# Altium PCB PCB3.PcbDoc (part 3 of 4)
Units mil, origin at the board's own origin, x right, y up, seen from the top; angles counter-clockwise.
Board outline 6000 x 4000 mil, 2 copper layers (Top Layer, Bottom Layer); 365 components, 395 nets, 1535 pads, 0 vias.
Unrouted connection lines stored in the file: 834.
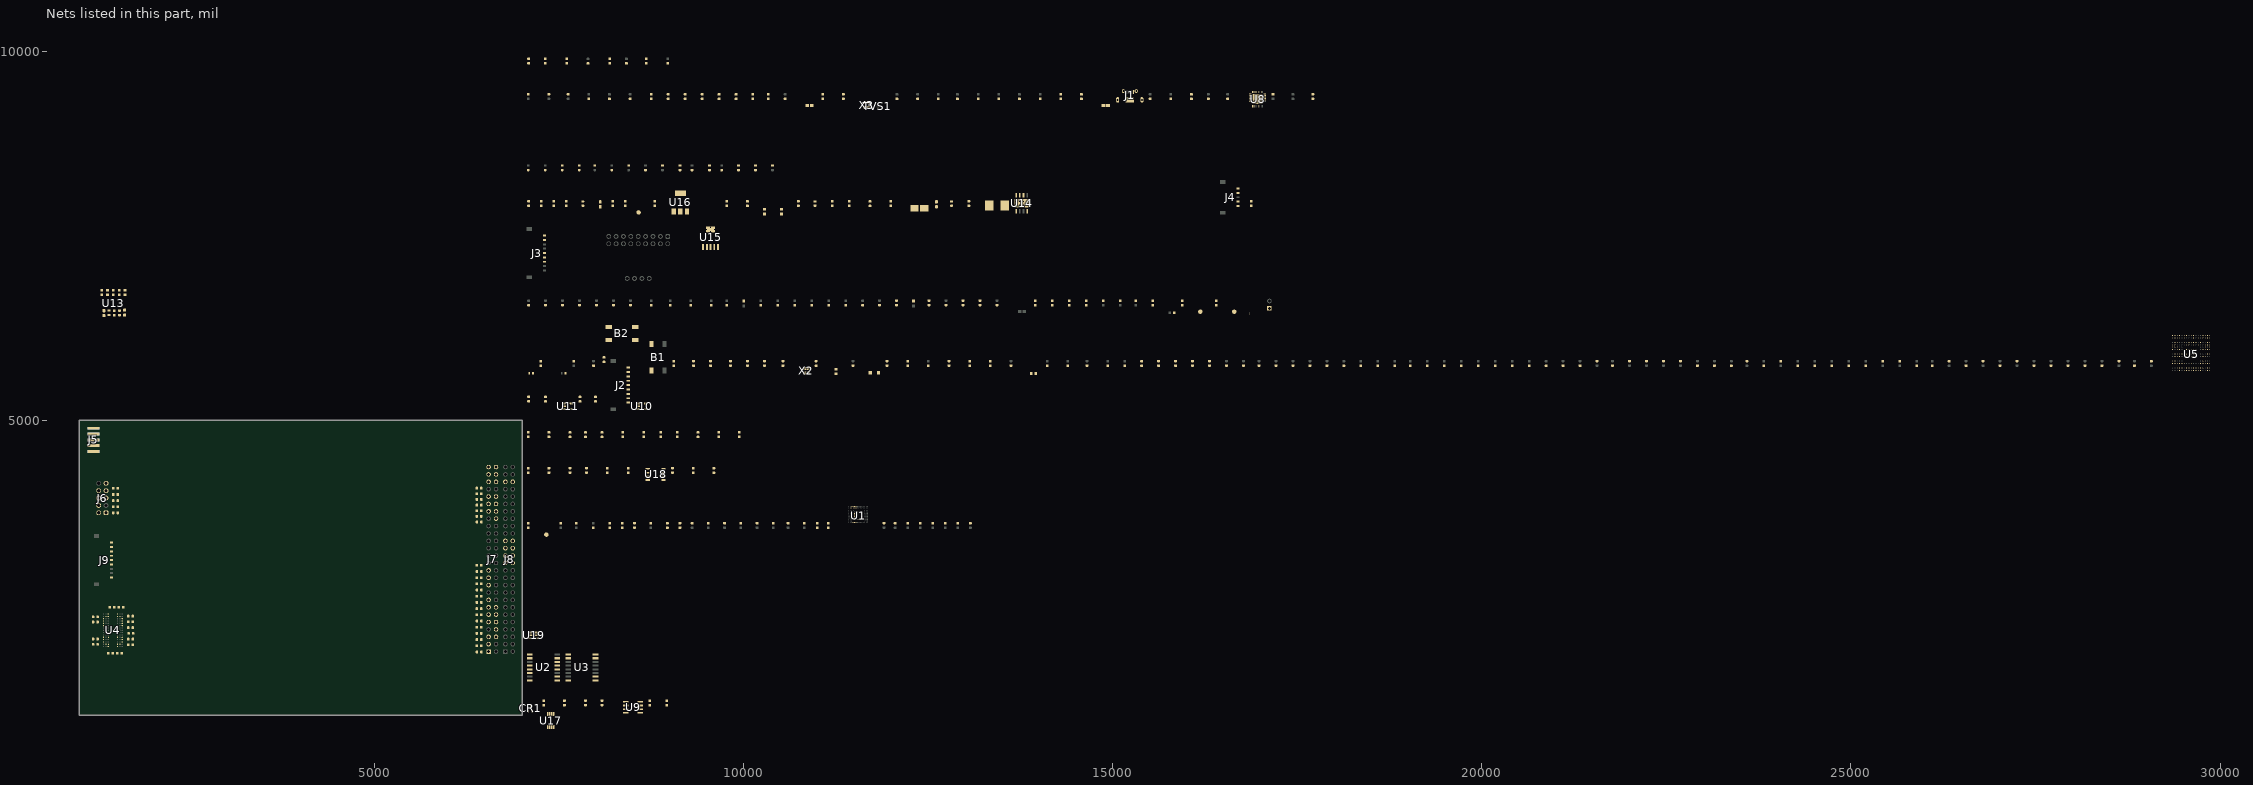
[diagram p2: the nets of this part, all layers, seen from the top]

## Nets (pads, with @x,y where several pads share a name; then routed paths per layer and width w, separated by ;. In a path a pad name is that pad's centre, name@x,y a point inside that pad or via, vN(x,y) a via of type N, cw(c..) or ccw(c..) an arc to the next point about the centre after c; other vN are vias at no path point)
1V8: C33.2 C61.2 TP2.1 U8.28 U8.30 U16.2
3.3V: C38.1 C39.1 U9.3
3V3: B2.1 B2.2 C1.2 C2.2 C3.2 C4.2 C7.2 C8.1 C9.2 C10.2 C11.2 C12.2 C13.2 C14.2 C15.2 C16.2 C17.2 C18.2 C19.2 C20.2 C21.2 C22.2 C26.2 C29.2 C36.2 C37.2 C41.2 C42.2 C43.2 C44.2 C56.2 C58.2 C62.2 C65.2 C66.2 C69.2 C71.2 C85.2 C86.2 DS1.1 DS2.1 J5.6 J6.1 J10.1 R1.2 R2.2 R3.2 R4.2 R5.2 R6.2 R7.2 R8.2 R17.2 R18.2 R35.1 R36.1 R109.1 R111.2 R112.1 R114.1 R135.2 R136.1 R137.1 R138.1 R139.1 R146.2 R147.2 R155.2 R162.1 R163.1 R164.1 R165.1 R192.2 R193.2 R194.2 R205.1 U1.C6 U1.E6 U1.F5 U1.J10 U1.K9 U1.M4 U1.N4 U1.P3 U1.P5 U2.2 U3.2 U4.A7 U4.B2 U4.B7 U4.C9 U4.D9 U4.E1 U4.F9 U4.L1 U4.L7 U4.M9 U4.N9 U4.P2 U4.P7 U4.R7 U5.M1 U8.21 U8.32 U10.1 U11.1 U15.4 U15.5 U16.3 U17.1 U17.8 U18.8 U19.1 X2.4 X3.4
3V3_BUS: J8.27 J8.28
3V3_SW1: J7.48
3V3_SW2: J7.50
3V3_SW3: J7.52
5V: C53.2 C54.2 C57.2 C59.1 L1.2 R153.1 U15.1 U15.2
5V_BUS: J8.25 J8.26
5V_SW1: J7.47
5V_SW2: J7.49
5V_SW3: J7.51
12V: C45.1 C50.2 C51.1 R154.2 U13.6 U14.7
12V_CONN: C46.1 J4.1 J4.2 J9.1 R148.1 U13.5
AUXOFF: R146.1 U13.3
BOOT0: R108.1 R109.2 U5.E8
CAN0_H: J7.03 R171.2
CAN0_L: J7.01 R170.2
CAN_RX: U5.E16 U9.4
CAN_TX: U5.E17 U9.1
COMM_I2C4_EN: R168.2 U5.D3
COMM_I2C4_SCL: R166.2 U5.R16
COMM_I2C4_SDA: R167.2 U5.R17
DEBUG_UART_RX: J5.9 R161.1 U5.N4
DEBUG_UART_TX: J5.8 R160.1 U5.N5
eMMC_RSTn: R17.1 R19.1 U1.K5
FLT#: R147.1 R149.1 U13.4
FPGA_D0: U5.N6
FPGA_D1: U5.P6
FPGA_D2: U5.T6
FPGA_D3: U5.U6
FPGA_D4: U5.U7
FPGA_D5: U5.R12
FPGA_D6: U5.N15
FPGA_D7: U5.N14
FPGA_D8: U5.N13
FPGA_D9: U5.M14
FPGA_RefC: U5.E15
FPGA_STATUS0: U5.L14
FPGA_STATUS1: U5.K14
FPGA_STATUS2: U5.D11
FPGA_STATUS3: U5.E10
FPGA_STATUS4: U5.D10
FPGA_TxC: U5.N3
FPGA_TxC_N: J3.7
FPGA_TxC_P: J3.6
FPGA_TxD_N: J3.2
FPGA_TxD_P: J3.1
FRAM_CS: R195.1 U5.T4
FRAM_SPI6_MISO: R198.1 U5.R3
FRAM_SPI6_MOSI: R197.1 U5.R5
FRAM_SPI6_SCK: R196.1 U5.D9
GND: B1.1 B1.2 C1.1 C2.1 C3.1 C4.1 C5.1 C6.1 C7.1 C8.2 C9.1 C10.1 C11.1 C12.1 C13.1 C14.1 C15.1 C16.1 C17.1 C18.1 C19.1 C20.1 C21.1 C22.1 C23.1 C24.1 C25.1 C26.1 C28.1 C29.1 C30.1 C31.1 C32.1 C33.1 C34.1 C35.1 C36.1 C37.1 C38.2 C39.2 C40.2 C41.1 C42.1 C43.1 C44.1 C45.2 C46.2 C47.1 C48.1 C51.2 C52.1 C54.1 C55.1 C59.2 C60.1 C61.1 C62.1 C63.1 C64.1 C67.1 C68.1 C70.1 C72.1 C79.2 C80.2 C81.2 C82.1 C83.1 C84.1 C85.1 C86.1 C87.2 C88.1 C89.2 C90.1 C91.1 C92.1 C93.1 C94.1 C95.1 C96.1 C97.1 C98.1 C99.1 C100.1 C101.1 C102.1 C103.1 C104.1 C105.1 C106.1 C107.1 C108.1 C109.1 CR1.3 D1.1 DS3.2 DS4.2 FB2.1 J2.5 J3.5 J4.4 J4.5 J5.10 J6.9 J8.29 J8.30 J8.31 J8.32 J8.47 J8.48 J9.2 R22.1 R108.2 R113.1 R116.2 R124.2 R140.2 R141.2 R142.2 R145.1 R151.2 R152.2 R156.2 R169.2 R203.1 R204.1 TP3.1 TP4.1 TVS1.B1 TVS1.B2 U1.A6 U1.C4 U1.E7 U1.G5 U1.H10 U1.J5 U1.K8 U1.N2 U1.N5 U1.P4 U1.P6 U2.10 U3.10 U4.A3 U4.B3 U4.B8 U4.C1 U4.D1 U4.E9 U4.F1 U4.L3 U4.L9 U4.M1 U4.N1 U4.P3 U4.P8 U4.R3 U5.A1 U5.A17 U5.B2 U5.C10 U5.C13 U5.G7 U5.G8 U5.G9 U5.G10 U5.G11 U5.G16 U5.H7 U5.H8 U5.H9 U5.H10 U5.H11 U5.J3 U5.J7 U5.J8 U5.J9 U5.J10 U5.J11 U5.J16 U5.J17 U5.K7 U5.K8 U5.K9 U5.K10 U5.K11 U5.K15 U5.L7 U5.L8 U5.L9 U5.L10 U5.L11 U5.L15 U5.M15 U5.N1 U5.N16 U5.P1 U5.R4 U5.R8 U5.U1 U5.U17 U6.2 U7.2 U8.33 U9.2 U10.2 U11.2 U13.8 U14.6 U14.9 U15.3 U15.6 U16.1 U16.4 U17.4 U18.4 U19.2 X2.2 X3.2
GND-SD: C73.2 C74.2 C75.2 C76.2 C77.2 C78.2 U5.B6 U5.C16 U5.F2 U5.T12
I2C0_SCL: J7.40 R187.1
I2C0_SDA: J7.38 R185.1
I2C1_SCL: J7.43 R190.2
I2C1_SDA: J7.41 R188.2
I2C2_SCL: J7.44 R191.1
I2C2_SDA: J7.42 R189.1
JTCK/SWCLK: J5.2 R158.2 U5.B14
JTDI: J5.4 J6.8 U5.A14
JTDO/SWO: J5.1 R157.2 U5.C6
JTMS/SWDIO: J5.3 R159.2 U5.C15
K_IN: U5.B10
LED1: R106.2 U5.D2
LED2: R110.2 U5.A9
LVDS_RxC_N: J2.9
LVDS_RxC_P: J2.8
LVDS_RxD_N: J2.4
LVDS_RxD_P: J2.3
LVDS_SPI_MOSI: U5.M2 U10.5
LVDS_SPI_SCK: U5.B12 U11.5
LVDS_TxC_N: J2.7 U11.3
LVDS_TxC_P: J2.6 U11.4
LVDS_TxD_N: J2.2 U10.3
LVDS_TxD_P: J2.1 U10.4
NC: J5.5
NetB2_3: B2.3 B2.4 C27.1 R115.2 R116.1 U7.1
NetC5_2: C5.2 C6.2 U1.C2
NetC24_2: C24.2 R103.2 X1.1
NetC25_2: C25.2 R104.2 X1.2
NetC27_2: C27.2 R114.2
NetC30_2: C30.2 C31.2 C32.2 FB2.2 J1.5 J1.SH1 J1.SH2 J1.SH3 J1.SH4 J1.SH5
NetC34_2: C34.2 C35.2 U8.20 U8.23
NetC40_1: C40.1 R143.1 R144.2 U9.5
NetC47_2: C47.2 U13.10
NetC48_2: C48.2 U13.7
NetC49_1: C49.1 D1.2 L1.1 U14.8
NetC49_2: C49.2 U14.1
NetC50_1: C50.1 C52.2
NetC53_1: C53.1 C55.2
NetC56_1: C56.1 C60.2
NetC57_1: C57.1 C63.2
NetC58_1: C58.1 C64.2
NetC65_1: C65.1 C67.2
NetC66_1: C66.1 C68.2
NetC69_1: C69.1 C70.2
NetC71_1: C71.1 C72.2
NetC73_1: C73.1 FB3.1 U5.F1
NetC74_1: C74.1 L2.2 U5.E1
NetC75_1: C75.1
NetC79_1: C79.1
NetC80_1: C80.1
NetC81_1: C81.1
NetC82_2: C82.2 U5.F17 U5.G17
NetC83_2: C83.2 C84.2 U5.N17
NetCR1_1: CR1.1 J9.3 R143.2 R171.1 U9.7
NetCR1_2: CR1.2 J9.4 R144.1 R170.1 U9.6
NetDS1_2: DS1.2 R106.1
NetDS2_2: DS2.2 R110.1
NetDS3_1: DS3.1 R154.1
NetDS4_1: DS4.1 R155.1
NetFB1_1: FB1.1 R125.2
NetFB1_2: FB1.2 J1.1 R117.1
NetJ6_2: J6.2 R157.1
NetJ6_4: J6.4 R158.1
NetJ6_5: J6.5 R160.2
NetJ6_6: J6.6 R159.1
NetJ6_7: J6.7 R161.2
NetJ7_05: J7.05 R172.2
NetJ7_06: J7.06 R173.1
NetJ7_08: J7.08 R174.1
NetJ7_09: J7.09 R175.2
NetJ7_10: J7.10 R176.1
NetJ7_11: J7.11 R177.2
NetJ7_12: J7.12 R178.1
NetJ7_13: J7.13 R179.2
NetJ7_14: J7.14 R180.1
NetJ7_15: J7.15 R181.2
NetJ7_19: J7.19 R182.2
NetJ7_21: J7.21 R183.2
NetJ7_23: J7.23 R184.2
NetJ7_39: J7.39 R186.2
NetJ9_5: J9.5 R164.2 R187.2 R190.1 R191.2 U17.7
NetJ9_6: J9.6 R165.2 R185.2 R188.1 R189.2 U17.6
NetJ9_9: J9.9 R117.2
NetR9_2: R9.2 U1.A3
NetR10_2: R10.2 U1.A4
NetR11_2: R11.2 U1.A5
NetR12_2: R12.2 U1.B2
NetR13_2: R13.2 U1.B3
NetR14_2: R14.2 U1.B4
NetR15_2: R15.2 U1.B5
NetR16_2: R16.2 U1.B6
NetR20_2: R20.2 U1.M5
NetR21_2: R21.2 U1.M6
NetR22_2: R22.2 TP1.1 U1.H5
NetR23_2: R23.2 U2.1
NetR24_2: R24.2 U3.1
NetR25_1: R25.1 U2.15
NetR26_1: R26.1 U3.15
NetR27_1: R27.1 U2.14
NetR28_2: R28.2 U2.4
NetR29_1: R29.1 U2.12
NetR30_2: R30.2 U2.5
NetR31_1: R31.1 U2.9
NetR32_2: R32.2 U3.8
NetR33_1: R33.1 U3.9
NetR34_2: R34.2 U2.8
NetR37_2: R37.2 U5.T8
NetR38_1: R38.1 U5.D13
NetR39_2: R39.2 U5.U8
NetR40_1: R40.1 U5.A16
NetR41_1: R41.1 U5.E12
NetR42_1: R42.1 U5.A15
NetR43_1: R43.1 U5.B15
NetR44_2: R44.2 U5.H14
NetR45_1: R45.1 U5.C14
NetR46_2: R46.2 U5.G14
NetR47_1: R47.1 U5.A4
NetR48_2: R48.2 U5.G15
NetR49_1: R49.1 U5.A3
NetR50_1: R50.1 U5.A2
NetR51_2: R51.2 U5.F15
NetR52_1: R52.1 U5.B3
NetR53_1: R53.1 U5.U16
NetR54_2: R54.2 U5.A10
NetR55_1: R55.1 U5.T17
NetR56_1: R56.1 U5.E2
NetR57_1: R57.1 U5.T16
NetR58_1: R58.1 U5.F3
NetR59_1: R59.1 U5.P16
NetR60_2: R60.2 U5.D8
NetR61_1: R61.1 U5.P15
NetR62_2: R62.2 U5.D6
NetR63_1: R63.1 U5.C4
NetR64_1: R64.1 U5.B4
NetR65_2: R65.2 U5.N2
NetR66_2: R66.2 U5.P2
NetR67_2: R67.2 U5.P4
NetR68_1: R68.1 U5.U9
NetR69_2: R69.2 U5.T11
NetR70_1: R70.1 U5.T9
NetR71_2: R71.2 U5.U13
NetR72_1: R72.1 U5.P9
NetR73_1: R73.1 U5.T13
NetR74_1: R74.1 U5.R13
NetR75_1: R75.1 U5.N9
NetR76_1: R76.1 U5.P13
NetR77_1: R77.1 U5.P10
NetR78_1: R78.1 U5.P14
NetR79_1: R79.1 U5.R10
NetR80_1: R80.1 U5.R14
NetR81_1: R81.1 U5.T10
NetR82_1: R82.1 U5.D16
NetR83_1: R83.1 U5.U10
NetR84_1: R84.1 U5.B17
NetR85_1: R85.1 U5.R11
NetR86_1: R86.1 U5.B16
NetR87_1: R87.1 U5.G4
NetR88_1: R88.1 U5.G3
NetR89_1: R89.1 U5.G1
NetR90_1: R90.1 U5.H4
NetR91_1: R91.1 U5.J5
NetR92_1: R92.1 U5.J4
NetR93_1: R93.1 U5.K2
NetR94_1: R94.1 U5.J2
NetR95_1: R95.1 U5.K3
NetR96_1: R96.1 U5.K4
NetR97_1: R97.1 U5.L4
NetR98_1: R98.1 U5.L3
NetR99_1: R99.1 U5.T7
NetR100_1: R100.1 U5.R7
NetR101_1: R101.1 U5.P7
NetR102_1: R102.1 U5.P8
NetR103_1: R103.1 U5.C2
NetR104_1: R104.1 U5.C1
NetR105_1: R105.1 U5.R9
NetR107_1: R107.1 R152.1 U13.9
NetR111_1: R111.1 X2.1
NetR112_2: R112.2 R113.2 U5.E7
NetR119_2: R119.2
NetR120_1: R120.1 U8.2
NetR121_1: R121.1 U8.31
NetR122_1: R122.1 U8.29
NetR123_1: R123.1 U8.1
NetR124_1: R124.1 U8.24
NetR125_1: R125.1 U8.22
NetR126_1: R126.1 U8.13
NetR127_1: R127.1 U8.10
NetR128_1: R128.1 U8.9
NetR129_1: R129.1 U8.7
NetR130_1: R130.1 U8.6
NetR131_1: R131.1 U8.5
NetR132_1: R132.1 U8.4
NetR133_1: R133.1 U8.3
NetR134_1: R134.1 U8.26
NetR135_1: R135.1 X3.1
NetR145_2: R145.2 U9.8
NetR148_2: R148.2 R150.1 U13.1
NetR149_2: R149.2
NetR150_2: R150.2 R151.1 U13.2
NetR153_2: R153.2 R156.1 U14.4
NetR162_2: R162.2 R167.1 U17.3
NetR163_2: R163.2 R166.1 U17.2
NetR168_1: R168.1 R169.1 U17.5
NetR172_1: R172.1
NetR173_2: R173.2
NetR174_2: R174.2
NetR175_1: R175.1
NetR176_2: R176.2
NetR177_1: R177.1
NetR178_2: R178.2
NetR179_1: R179.1
NetR180_2: R180.2
NetR181_1: R181.1
NetR182_1: R182.1
NetR183_1: R183.1
NetR184_1: R184.1
NetR186_1: R186.1
NetR192_1: R192.1 R195.2 U18.1
NetR193_1: R193.1 U18.7
NetR194_1: R194.1 U18.3
NetR196_2: R196.2 U18.6
NetR197_2: R197.2 U18.5
NetR198_2: R198.2 U18.2
NetR199_1: R199.1 U19.6
NetR200_1: R200.1 R203.2
NetR200_2: R200.2 R204.2 U19.3
NetR201_1: R201.1 U19.5
NetR202_1: R202.1 U19.4
NetSB1_1: U3.16
NetSB2_1: U2.13
NetSB3_2: U2.6
NetSB8_2: U5.A7 U5.D17 U5.U11
NetSB14_2: U5.A6 U5.C17 U5.U12
NetSB17_1: U5.P17
NetSB18_2: U5.B1
OSC_24M: R134.2 X3.3
OSC_25M: R94.2 X2.3
QSPI_BK1_IO0: R25.2 R96.2
QSPI_BK1_IO1: R34.1 R97.2
QSPI_BK1_IO2: R31.2 R95.2
QSPI_BK1_IO3: R23.1 R93.2